# Altium PCB machpcb.PcbDoc
Units mil, origin at the board's own origin, x right, y up, seen from the top; angles counter-clockwise.
Board outline 6000 x 4000 mil, 2 copper layers (Top Layer, Bottom Layer); 5 components, 4 nets, 1203 pads, 0 vias.
Unrouted connection lines stored in the file: 4.
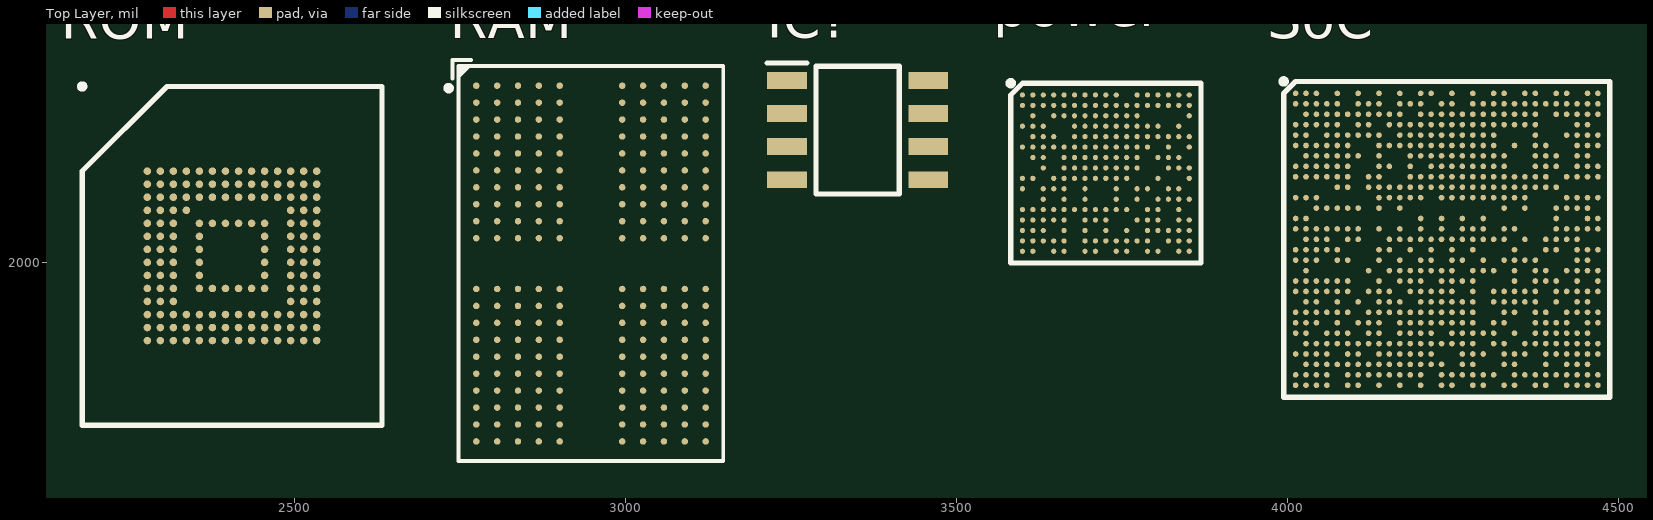
[diagram p0: Top Layer view]
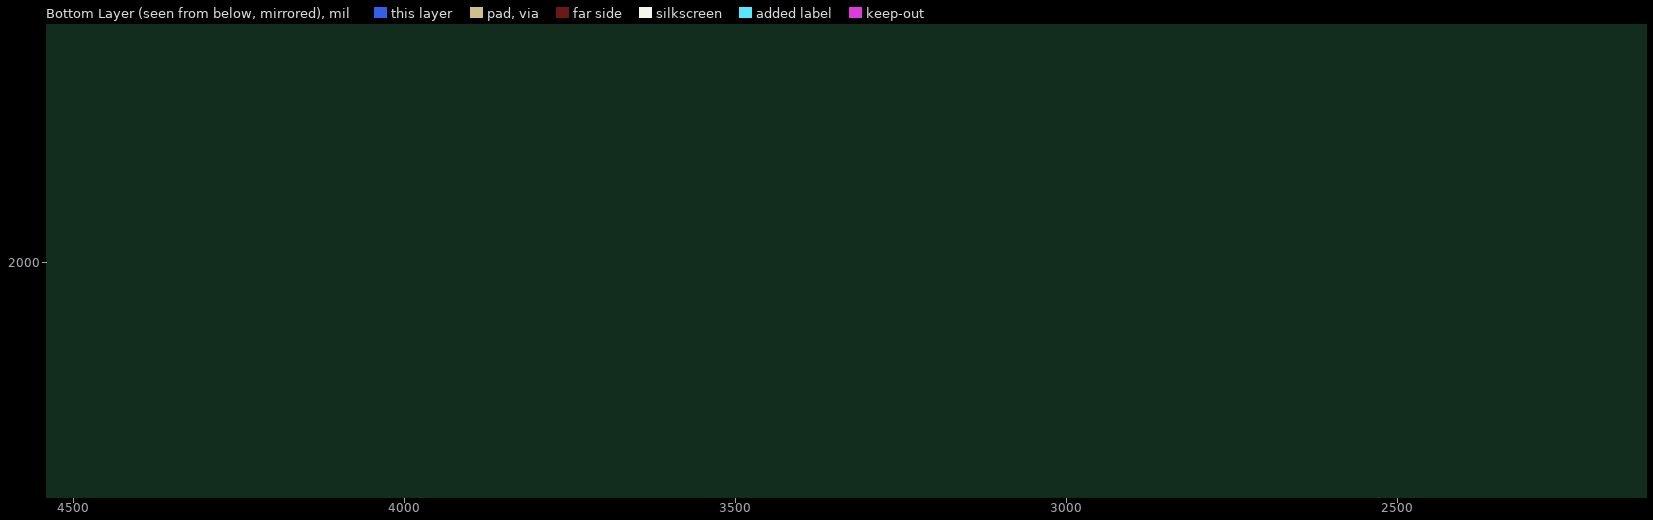
[diagram p1: Bottom Layer view, seen from below]

## Layer stack, top to bottom
Top Solder: solder mask 0.4, Solder Resist, Dk 3.5
Top Layer: signal copper 1.4
Dielectric 1: dielectric 12.6, FR-4, Dk 4.8
Bottom Layer: signal copper 1.4
Bottom Solder: solder mask 0.4, Solder Resist, Dk 3.5

## Board outline
0,0 6000,0 6000,4000 0,4000

## Design rules (kind name [scope] priority, off if disabled: settings)
Clearance [All] p1: gap=10 ignorepadtopadclearanceinfootprint=FALSE
PolygonConnect [All] p1: connectstyle=Relief reliefconductorwidth=10 reliefentries=4 polygonreliefangle="90 Angle" airgapwidth=10
RoutingVias [All] p1: holewidth=28 width=50 viastyle="Through Hole" minholewidth=28 minwidth=50 maxholewidth=28 maxwidth=50
SolderMaskExpansion [All] p1: expansion=4 istentingtop=FALSE
Width [All] p1: maxlimit=10 minlimit=10 preferedwidth=10
30 further rules are at their usual default settings.

## Components (designator, comment, footprint, x,y, rotation, side; value= is the part's Value field where it differs from the comment)
IC? "NE555DR" SOIC127P600X175-8N 3350,2200 r0 top
power "MT6357ARV_A" BGA209C40P17X16_700X660X100 3725,2135 r0 top (schematic designator IC?)
RAM "K4UBE3D4AA-MGCL" K4F8E304HB-MGCJ 2950,1990 r0 top (schematic designator U?)
ROM "KLMAG1JETD-B041" BGA153C50P14X14_1150X1300X80 2405,2010 r0 top (schematic designator IC?)
SoC "MT8365V_BZB" BGA633C40P30X29_1220X1180X90 4240,2035 r0 top (schematic designator IC?)

## Footprints (in the part's own frame and the unit in brackets; to place one, negate y for a bottom-side part, rotate by r counter-clockwise, add the part's x,y. Pads: shape width x height; smd on the part's side, far side on the other; paste and mask are expansions set on the pad)
BGA153C50P14X14_1150X1300X80 [mm]
  round 0.29 smd: A1(-3.25,3.25) A2(-2.75,3.25) A3(-2.25,3.25) A4(-1.75,3.25) A5(-1.25,3.25) A6(-0.75,3.25) A7(-0.25,3.25) A8(0.25,3.25) A9(0.75,3.25) A10(1.25,3.25) A11(1.75,3.25) A12(2.25,3.25) A13(2.75,3.25) A14(3.25,3.25) B1(-3.25,2.75) B2(-2.75,2.75) B3(-2.25,2.75) B4(-1.75,2.75) B5(-1.25,2.75) B6(-0.75,2.75) B7(-0.25,2.75) B8(0.25,2.75) B9(0.75,2.75) B10(1.25,2.75) B11(1.75,2.75) B12(2.25,2.75) B13(2.75,2.75) B14(3.25,2.75) C1(-3.25,2.25) C2(-2.75,2.25) C3(-2.25,2.25) C4(-1.75,2.25) C5(-1.25,2.25) C6(-0.75,2.25) C7(-0.25,2.25) C8(0.25,2.25) C9(0.75,2.25) C10(1.25,2.25) C11(1.75,2.25) C12(2.25,2.25) C13(2.75,2.25) C14(3.25,2.25) D1(-3.25,1.75) D2(-2.75,1.75) D3(-2.25,1.75) D4(-1.75,1.75) D12(2.25,1.75) D13(2.75,1.75) D14(3.25,1.75) E1(-3.25,1.25) E2(-2.75,1.25) E3(-2.25,1.25) E5(-1.25,1.25) E6(-0.75,1.25) E7(-0.25,1.25) E8(0.25,1.25) E9(0.75,1.25) E10(1.25,1.25) E12(2.25,1.25) E13(2.75,1.25) E14(3.25,1.25) F1(-3.25,0.75) F2(-2.75,0.75) F3(-2.25,0.75) F5(-1.25,0.75) F10(1.25,0.75) F12(2.25,0.75) F13(2.75,0.75) F14(3.25,0.75) G1(-3.25,0.25) G2(-2.75,0.25) G3(-2.25,0.25) G5(-1.25,0.25) G10(1.25,0.25) G12(2.25,0.25) G13(2.75,0.25) G14(3.25,0.25) H1(-3.25,-0.25) H2(-2.75,-0.25) H3(-2.25,-0.25) H5(-1.25,-0.25) H10(1.25,-0.25) H12(2.25,-0.25) H13(2.75,-0.25) H14(3.25,-0.25) J1(-3.25,-0.75) J2(-2.75,-0.75) J3(-2.25,-0.75) J5(-1.25,-0.75) J10(1.25,-0.75) J12(2.25,-0.75) J13(2.75,-0.75) J14(3.25,-0.75) K1(-3.25,-1.25) K2(-2.75,-1.25) K3(-2.25,-1.25) K5(-1.25,-1.25) K6(-0.75,-1.25) K7(-0.25,-1.25) K8(0.25,-1.25) K9(0.75,-1.25) K10(1.25,-1.25) K12(2.25,-1.25) K13(2.75,-1.25) K14(3.25,-1.25) L1(-3.25,-1.75) L2(-2.75,-1.75) L3(-2.25,-1.75) L12(2.25,-1.75) L13(2.75,-1.75) L14(3.25,-1.75) M1(-3.25,-2.25) M2(-2.75,-2.25) M3(-2.25,-2.25) M4(-1.75,-2.25) M5(-1.25,-2.25) M6(-0.75,-2.25) M7(-0.25,-2.25) M8(0.25,-2.25) M9(0.75,-2.25) M10(1.25,-2.25) M11(1.75,-2.25) M12(2.25,-2.25) M13(2.75,-2.25) M14(3.25,-2.25) N1(-3.25,-2.75) N2(-2.75,-2.75) N3(-2.25,-2.75) N4(-1.75,-2.75) N5(-1.25,-2.75) N6(-0.75,-2.75) N7(-0.25,-2.75) N8(0.25,-2.75) N9(0.75,-2.75) N10(1.25,-2.75) N11(1.75,-2.75) N12(2.25,-2.75) N13(2.75,-2.75) N14(3.25,-2.75) P1(-3.25,-3.25) P2(-2.75,-3.25) P3(-2.25,-3.25) P4(-1.75,-3.25) P5(-1.25,-3.25) P6(-0.75,-3.25) P7(-0.25,-3.25) P8(0.25,-3.25) P9(0.75,-3.25) P10(1.25,-3.25) P11(1.75,-3.25) P12(2.25,-3.25) P13(2.75,-3.25) P14(3.25,-3.25)
  silkscreen extent -5.85,-6.5 5.75,6.6, body extent -5.75,-6.5 5.75,6.5, height 0.8
BGA209C40P17X16_700X660X100 [mm]
  round 0.2 smd: A1(-3.2,3) A2(-2.8,3) A3(-2.4,3) A4(-2,3) A5(-1.6,3) A6(-1.2,3) A7(-0.8,3) A8(-0.4,3) A9(0,3) A10(0.4,3) A12(1.2,3) A13(1.6,3) A14(2,3) A15(2.4,3) A16(2.8,3) A17(3.2,3) B1(-3.2,2.6) B2(-2.8,2.6) B3(-2.4,2.6) B4(-2,2.6) B5(-1.6,2.6) B6(-1.2,2.6) B7(-0.8,2.6) B8(-0.4,2.6) B9(0,2.6) B10(0.4,2.6) B11(0.8,2.6) B12(1.2,2.6) B13(1.6,2.6) B14(2,2.6) B15(2.4,2.6) B16(2.8,2.6) B17(3.2,2.6) C2(-2.8,2.2) C4(-2,2.2) C5(-1.6,2.2) C6(-1.2,2.2) C7(-0.8,2.2) C8(-0.4,2.2) C9(0,2.2) C10(0.4,2.2) C11(0.8,2.2) C12(1.2,2.2) C17(3.2,2.2) D1(-3.2,1.8) D2(-2.8,1.8) D3(-2.4,1.8) D6(-1.2,1.8) D7(-0.8,1.8) D8(-0.4,1.8) D9(0,1.8) D10(0.4,1.8) D11(0.8,1.8) D12(1.2,1.8) D13(1.6,1.8) D14(2,1.8) D16(2.8,1.8) E2(-2.8,1.4) E3(-2.4,1.4) E4(-2,1.4) E6(-1.2,1.4) E7(-0.8,1.4) E8(-0.4,1.4) E9(0,1.4) E10(0.4,1.4) E11(0.8,1.4) E12(1.2,1.4) E13(1.6,1.4) E14(2,1.4) E15(2.4,1.4) E16(2.8,1.4) E17(3.2,1.4) F1(-3.2,1) F2(-2.8,1) F3(-2.4,1) F4(-2,1) F5(-1.6,1) F6(-1.2,1) F7(-0.8,1) F8(-0.4,1) F9(0,1) F10(0.4,1) F11(0.8,1) F12(1.2,1) F13(1.6,1) F15(2.4,1) F17(3.2,1) G2(-2.8,0.6) G3(-2.4,0.6) G5(-1.6,0.6) G6(-1.2,0.6) G7(-0.8,0.6) G8(-0.4,0.6) G9(0,0.6) G10(0.4,0.6) G11(0.8,0.6) G12(1.2,0.6) G14(2,0.6) G15(2.4,0.6) G16(2.8,0.6) H3(-2.4,0.2) H5(-1.6,0.2) H6(-1.2,0.2) H7(-0.8,0.2) H8(-0.4,0.2) H9(0,0.2) H10(0.4,0.2) H11(0.8,0.2) H12(1.2,0.2) H15(2.4,0.2) H16(2.8,0.2) H17(3.2,0.2) J1(-3.2,-0.2) J2(-2.8,-0.2) J4(-2,-0.2) J5(-1.6,-0.2) J6(-1.2,-0.2) J7(-0.8,-0.2) J8(-0.4,-0.2) J9(0,-0.2) J10(0.4,-0.2) J11(0.8,-0.2) J14(2,-0.2) J17(3.2,-0.2) K1(-3.2,-0.6) K3(-2.4,-0.6) K4(-2,-0.6) K5(-1.6,-0.6) K7(-0.8,-0.6) K10(0.4,-0.6) K12(1.2,-0.6) K13(1.6,-0.6) K15(2.4,-0.6) K16(2.8,-0.6) L3(-2.4,-1) L5(-1.6,-1) L7(-0.8,-1) L10(0.4,-1) L12(1.2,-1) L14(2,-1) L15(2.4,-1) L16(2.8,-1) L17(3.2,-1) M1(-3.2,-1.4) M2(-2.8,-1.4) M3(-2.4,-1.4) M4(-2,-1.4) M5(-1.6,-1.4) M6(-1.2,-1.4) M7(-0.8,-1.4) M8(-0.4,-1.4) M9(0,-1.4) M10(0.4,-1.4) M11(0.8,-1.4) M13(1.6,-1.4) M14(2,-1.4) M16(2.8,-1.4) N1(-3.2,-1.8) N2(-2.8,-1.8) N3(-2.4,-1.8) N4(-2,-1.8) N5(-1.6,-1.8) N7(-0.8,-1.8) N8(-0.4,-1.8) N9(0,-1.8) N12(1.2,-1.8) N13(1.6,-1.8) N14(2,-1.8) N16(2.8,-1.8) N17(3.2,-1.8) P1(-3.2,-2.2) P2(-2.8,-2.2) P3(-2.4,-2.2) P5(-1.6,-2.2) P7(-0.8,-2.2) P9(0,-2.2) P11(0.8,-2.2) P13(1.6,-2.2) P14(2,-2.2) P15(2.4,-2.2) P16(2.8,-2.2) P17(3.2,-2.2) R1(-3.2,-2.6) R2(-2.8,-2.6) R3(-2.4,-2.6) R4(-2,-2.6) R5(-1.6,-2.6) R7(-0.8,-2.6) R8(-0.4,-2.6) R9(0,-2.6) R10(0.4,-2.6) R11(0.8,-2.6) R12(1.2,-2.6) R13(1.6,-2.6) R15(2.4,-2.6) R16(2.8,-2.6) R17(3.2,-2.6) T1(-3.2,-3) T2(-2.8,-3) T4(-2,-3) T5(-1.6,-3) T7(-0.8,-3) T8(-0.4,-3) T10(0.4,-3) T11(0.8,-3) T13(1.6,-3) T14(2,-3) T16(2.8,-3) T17(3.2,-3)
  silkscreen extent -3.75,-3.45 3.65,3.55, body extent -3.5,-3.3 3.5,3.3, height 1
BGA633C40P30X29_1220X1180X90 [mm]
  round 0.216 smd: A1(-5.8,5.6) A2(-5.4,5.6) A3(-5,5.6) A5(-4.2,5.6) A7(-3.4,5.6) A9(-2.6,5.6) A11(-1.8,5.6) A13(-1,5.6) A14(-0.6,5.6) A16(0.2,5.6) A18(1,5.6) A20(1.8,5.6) A21(2.2,5.6) A23(3,5.6) A24(3.4,5.6) A26(4.2,5.6) A27(4.6,5.6) A29(5.4,5.6) A30(5.8,5.6) AA2(-5.4,-2.4) AA3(-5,-2.4) AA5(-4.2,-2.4) AA7(-3.4,-2.4) AA9(-2.6,-2.4) AA10(-2.2,-2.4) AA11(-1.8,-2.4) AA13(-1,-2.4) AA14(-0.6,-2.4) AA15(-0.2,-2.4) AA16(0.2,-2.4) AA17(0.6,-2.4) AA18(1,-2.4) AA20(1.8,-2.4) AA21(2.2,-2.4) AA22(2.6,-2.4) AA23(3,-2.4) AA24(3.4,-2.4) AA26(4.2,-2.4) AA28(5,-2.4) AA29(5.4,-2.4) AB1(-5.8,-2.8) AB2(-5.4,-2.8) AB3(-5,-2.8) AB4(-4.6,-2.8) AB5(-4.2,-2.8) AB6(-3.8,-2.8) AB8(-3,-2.8) AB9(-2.6,-2.8) AB10(-2.2,-2.8) AB11(-1.8,-2.8) AB12(-1.4,-2.8) AB13(-1,-2.8) AB14(-0.6,-2.8) AB15(-0.2,-2.8) AB16(0.2,-2.8) AB17(0.6,-2.8) AB18(1,-2.8) AB21(2.2,-2.8) AB22(2.6,-2.8) AB24(3.4,-2.8) AB25(3.8,-2.8) AB27(4.6,-2.8) AB28(5,-2.8) AB29(5.4,-2.8) AB30(5.8,-2.8) AC1(-5.8,-3.2) AC2(-5.4,-3.2) AC3(-5,-3.2) AC5(-4.2,-3.2) AC7(-3.4,-3.2) AC8(-3,-3.2) AC9(-2.6,-3.2) AC11(-1.8,-3.2) AC12(-1.4,-3.2) AC13(-1,-3.2) AC14(-0.6,-3.2) AC15(-0.2,-3.2) AC16(0.2,-3.2) AC17(0.6,-3.2) AC18(1,-3.2) AC20(1.8,-3.2) AC21(2.2,-3.2) AC24(3.4,-3.2) AC25(3.8,-3.2) AC26(4.2,-3.2) AC27(4.6,-3.2) AC29(5.4,-3.2) AC30(5.8,-3.2) AD1(-5.8,-3.6) AD2(-5.4,-3.6) AD4(-4.6,-3.6) AD5(-4.2,-3.6) AD6(-3.8,-3.6) AD8(-3,-3.6) AD9(-2.6,-3.6) AD11(-1.8,-3.6) AD12(-1.4,-3.6) AD13(-1,-3.6) AD14(-0.6,-3.6) AD16(0.2,-3.6) AD17(0.6,-3.6) AD18(1,-3.6) AD19(1.4,-3.6) AD20(1.8,-3.6) AD22(2.6,-3.6) AD24(3.4,-3.6) AD25(3.8,-3.6) AD26(4.2,-3.6) AD27(4.6,-3.6) AD28(5,-3.6) AD29(5.4,-3.6) AE2(-5.4,-4) AE3(-5,-4) AE4(-4.6,-4) AE5(-4.2,-4) AE6(-3.8,-4) AE7(-3.4,-4) AE8(-3,-4) AE9(-2.6,-4) AE10(-2.2,-4) AE11(-1.8,-4) AE12(-1.4,-4) AE13(-1,-4) AE14(-0.6,-4) AE15(-0.2,-4) AE16(0.2,-4) AE17(0.6,-4) AE18(1,-4) AE20(1.8,-4) AE21(2.2,-4) AE23(3,-4) AE24(3.4,-4) AE25(3.8,-4) AE26(4.2,-4) AE27(4.6,-4) AE28(5,-4) AE29(5.4,-4) AE30(5.8,-4) AF1(-5.8,-4.4) AF2(-5.4,-4.4) AF3(-5,-4.4) AF4(-4.6,-4.4) AF6(-3.8,-4.4) AF7(-3.4,-4.4) AF9(-2.6,-4.4) AF10(-2.2,-4.4) AF11(-1.8,-4.4) AF12(-1.4,-4.4) AF13(-1,-4.4) AF14(-0.6,-4.4) AF17(0.6,-4.4) AF18(1,-4.4) AF19(1.4,-4.4) AF21(2.2,-4.4) AF22(2.6,-4.4) AF23(3,-4.4) AF25(3.8,-4.4) AF26(4.2,-4.4) AF27(4.6,-4.4) AF28(5,-4.4) AF29(5.4,-4.4) AF30(5.8,-4.4) AG2(-5.4,-4.8) AG3(-5,-4.8) AG4(-4.6,-4.8) AG5(-4.2,-4.8) AG6(-3.8,-4.8) AG7(-3.4,-4.8) AG8(-3,-4.8) AG9(-2.6,-4.8) AG10(-2.2,-4.8) AG11(-1.8,-4.8) AG12(-1.4,-4.8) AG13(-1,-4.8) AG14(-0.6,-4.8) AG15(-0.2,-4.8) AG17(0.6,-4.8) AG18(1,-4.8) AG21(2.2,-4.8) AG22(2.6,-4.8) AG25(3.8,-4.8) AG27(4.6,-4.8) AG28(5,-4.8) AG29(5.4,-4.8) AH1(-5.8,-5.2) AH2(-5.4,-5.2) AH3(-5,-5.2) AH4(-4.6,-5.2) AH6(-3.8,-5.2) AH7(-3.4,-5.2) AH8(-3,-5.2) AH9(-2.6,-5.2) AH10(-2.2,-5.2) AH11(-1.8,-5.2) AH12(-1.4,-5.2) AH13(-1,-5.2) AH15(-0.2,-5.2) AH16(0.2,-5.2) AH17(0.6,-5.2) AH18(1,-5.2) AH19(1.4,-5.2) AH20(1.8,-5.2) AH22(2.6,-5.2) AH23(3,-5.2) AH24(3.4,-5.2) AH25(3.8,-5.2) AH26(4.2,-5.2) AH27(4.6,-5.2) AH28(5,-5.2) AH29(5.4,-5.2) AH30(5.8,-5.2) AJ1(-5.8,-5.6) AJ2(-5.4,-5.6) AJ3(-5,-5.6) AJ4(-4.6,-5.6) AJ6(-3.8,-5.6) AJ7(-3.4,-5.6) AJ9(-2.6,-5.6) AJ11(-1.8,-5.6) AJ13(-1,-5.6) AJ15(-0.2,-5.6) AJ16(0.2,-5.6) AJ18(1,-5.6) AJ19(1.4,-5.6) AJ21(2.2,-5.6) AJ22(2.6,-5.6) AJ24(3.4,-5.6) AJ25(3.8,-5.6) AJ27(4.6,-5.6) AJ28(5,-5.6) AJ29(5.4,-5.6) AJ30(5.8,-5.6) B1(-5.8,5.2) B2(-5.4,5.2) B3(-5,5.2) B4(-4.6,5.2) B5(-4.2,5.2) B7(-3.4,5.2) B8(-3,5.2) B9(-2.6,5.2) B11(-1.8,5.2) B12(-1.4,5.2) B13(-1,5.2) B15(-0.2,5.2) B16(0.2,5.2) B18(1,5.2) B19(1.4,5.2) B20(1.8,5.2) B21(2.2,5.2) B22(2.6,5.2) B23(3,5.2) B24(3.4,5.2) B25(3.8,5.2) B26(4.2,5.2) B27(4.6,5.2) B28(5,5.2) B29(5.4,5.2) B30(5.8,5.2) C2(-5.4,4.8) C3(-5,4.8) C4(-4.6,4.8) C5(-4.2,4.8) C6(-3.8,4.8) C7(-3.4,4.8) C8(-3,4.8) C9(-2.6,4.8) C10(-2.2,4.8) C11(-1.8,4.8) C13(-1,4.8) C14(-0.6,4.8) C15(-0.2,4.8) C16(0.2,4.8) C17(0.6,4.8) C18(1,4.8) C19(1.4,4.8) C20(1.8,4.8) C21(2.2,4.8) C22(2.6,4.8) C23(3,4.8) C24(3.4,4.8) C26(4.2,4.8) C27(4.6,4.8) C28(5,4.8) C29(5.4,4.8) C30(5.8,4.8) D1(-5.8,4.4) D2(-5.4,4.4) D3(-5,4.4) D4(-4.6,4.4) D5(-4.2,4.4) D7(-3.4,4.4) D8(-3,4.4) D10(-2.2,4.4) D11(-1.8,4.4) D12(-1.4,4.4) D13(-1,4.4) D14(-0.6,4.4) D15(-0.2,4.4) D16(0.2,4.4) D17(0.6,4.4) D18(1,4.4) D19(1.4,4.4) D20(1.8,4.4) D21(2.2,4.4) D22(2.6,4.4) D23(3,4.4) D24(3.4,4.4) D28(5,4.4) D29(5.4,4.4) E1(-5.8,4) E2(-5.4,4) E4(-4.6,4) E5(-4.2,4) E6(-3.8,4) E7(-3.4,4) E8(-3,4) E9(-2.6,4) E11(-1.8,4) E12(-1.4,4) E13(-1,4) E14(-0.6,4) E15(-0.2,4) E16(0.2,4) E17(0.6,4) E18(1,4) E19(1.4,4) E20(1.8,4) E24(3.4,4) E27(4.6,4) E28(5,4) E29(5.4,4) E30(5.8,4) F1(-5.8,3.6) F2(-5.4,3.6) F3(-5,3.6) F4(-4.6,3.6) F5(-4.2,3.6) F6(-3.8,3.6) F9(-2.6,3.6) F10(-2.2,3.6) F11(-1.8,3.6) F12(-1.4,3.6) F13(-1,3.6) F14(-0.6,3.6) F15(-0.2,3.6) F16(0.2,3.6) F17(0.6,3.6) F18(1,3.6) F19(1.4,3.6) F20(1.8,3.6) F22(2.6,3.6) F24(3.4,3.6) F25(3.8,3.6) F28(5,3.6) F29(5.4,3.6) F30(5.8,3.6) G2(-5.4,3.2) G3(-5,3.2) G4(-4.6,3.2) G5(-4.2,3.2) G6(-3.8,3.2) G7(-3.4,3.2) G9(-2.6,3.2) G12(-1.4,3.2) G13(-1,3.2) G14(-0.6,3.2) G15(-0.2,3.2) G16(0.2,3.2) G17(0.6,3.2) G18(1,3.2) G19(1.4,3.2) G20(1.8,3.2) G21(2.2,3.2) G24(3.4,3.2) G25(3.8,3.2) G26(4.2,3.2) G28(5,3.2) G29(5.4,3.2) H1(-5.8,2.8) H2(-5.4,2.8) H3(-5,2.8) H4(-4.6,2.8) H5(-4.2,2.8) H6(-3.8,2.8) H9(-2.6,2.8) H10(-2.2,2.8) H12(-1.4,2.8) H14(-0.6,2.8) H15(-0.2,2.8) H16(0.2,2.8) H17(0.6,2.8) H18(1,2.8) H19(1.4,2.8) H20(1.8,2.8) H21(2.2,2.8) H24(3.4,2.8) H25(3.8,2.8) H26(4.2,2.8) H28(5,2.8) H29(5.4,2.8) H30(5.8,2.8) J1(-5.8,2.4) J2(-5.4,2.4) J3(-5,2.4) J4(-4.6,2.4) J5(-4.2,2.4) J6(-3.8,2.4) J8(-3,2.4) J9(-2.6,2.4) J12(-1.4,2.4) J13(-1,2.4) J14(-0.6,2.4) J15(-0.2,2.4) J16(0.2,2.4) J17(0.6,2.4) J18(1,2.4) J19(1.4,2.4) J20(1.8,2.4) J21(2.2,2.4) J22(2.6,2.4) J23(3,2.4) J24(3.4,2.4) J25(3.8,2.4) J27(4.6,2.4) J28(5,2.4) J29(5.4,2.4) J30(5.8,2.4) K5(-4.2,2) K6(-3.8,2) K8(-3,2) K9(-2.6,2) K10(-2.2,2) K11(-1.8,2) K12(-1.4,2) K13(-1,2) K14(-0.6,2) K15(-0.2,2) K16(0.2,2) K17(0.6,2) K18(1,2) K19(1.4,2) K20(1.8,2) K21(2.2,2) K22(2.6,2) K23(3,2) K24(3.4,2) K25(3.8,2) K26(4.2,2) L1(-5.8,1.6) L2(-5.4,1.6) L3(-5,1.6) L9(-2.6,1.6) L10(-2.2,1.6) L11(-1.8,1.6) L12(-1.4,1.6) L13(-1,1.6) L15(-0.2,1.6) L16(0.2,1.6) L17(0.6,1.6) L18(1,1.6) L19(1.4,1.6) L20(1.8,1.6) L21(2.2,1.6) L22(2.6,1.6) L23(3,1.6) L27(4.6,1.6) L28(5,1.6) L29(5.4,1.6) L30(5.8,1.6) M3(-5,1.2) M4(-4.6,1.2) M5(-4.2,1.2) M6(-3.8,1.2) M7(-3.4,1.2) M9(-2.6,1.2) M11(-1.8,1.2) M21(2.2,1.2) M23(3,1.2) M26(4.2,1.2) M27(4.6,1.2) M28(5,1.2) M29(5.4,1.2) N1(-5.8,0.8) N2(-5.4,0.8) N13(-1,0.8) N15(-0.2,0.8) N17(0.6,0.8) N19(1.4,0.8) N26(4.2,0.8) N29(5.4,0.8) N30(5.8,0.8) P1(-5.8,0.4) P2(-5.4,0.4) P3(-5,0.4) P4(-4.6,0.4) P5(-4.2,0.4) P6(-3.8,0.4) P7(-3.4,0.4) P9(-2.6,0.4) P11(-1.8,0.4) P13(-1,0.4) P15(-0.2,0.4) P17(0.6,0.4) P18(1,0.4) P19(1.4,0.4) P21(2.2,0.4) P22(2.6,0.4) P26(4.2,0.4) P27(4.6,0.4) P28(5,0.4) P29(5.4,0.4) P30(5.8,0.4) R2(-5.4,0) R3(-5,0) R4(-4.6,0) R6(-3.8,0) R7(-3.4,0) R10(-2.2,0) R11(-1.8,0) R12(-1.4,0) R13(-1,0) R14(-0.6,0) R15(-0.2,0) R16(0.2,0) R17(0.6,0) R18(1,0) R19(1.4,0) R20(1.8,0) R21(2.2,0) R23(3,0) R25(3.8,0) R26(4.2,0) R27(4.6,0) R28(5,0) T1(-5.8,-0.4) T2(-5.4,-0.4) T3(-5,-0.4) T4(-4.6,-0.4) T5(-4.2,-0.4) T9(-2.6,-0.4) T10(-2.2,-0.4) T12(-1.4,-0.4) T14(-0.6,-0.4) T16(0.2,-0.4) T18(1,-0.4) T22(2.6,-0.4) T25(3.8,-0.4) T26(4.2,-0.4) T28(5,-0.4) T29(5.4,-0.4) T30(5.8,-0.4) U1(-5.8,-0.8) U2(-5.4,-0.8) U3(-5,-0.8) U5(-4.2,-0.8) U6(-3.8,-0.8) U9(-2.6,-0.8) U11(-1.8,-0.8) U13(-1,-0.8) U14(-0.6,-0.8) U16(0.2,-0.8) U17(0.6,-0.8) U19(1.4,-0.8) U21(2.2,-0.8) U22(2.6,-0.8) U23(3,-0.8) U24(3.4,-0.8) U28(5,-0.8) U29(5.4,-0.8) V2(-5.4,-1.2) V8(-3,-1.2) V10(-2.2,-1.2) V11(-1.8,-1.2) V12(-1.4,-1.2) V13(-1,-1.2) V14(-0.6,-1.2) V15(-0.2,-1.2) V16(0.2,-1.2) V18(1,-1.2) V19(1.4,-1.2) V20(1.8,-1.2) V22(2.6,-1.2) V24(3.4,-1.2) V25(3.8,-1.2) V27(4.6,-1.2) V28(5,-1.2) V29(5.4,-1.2) V30(5.8,-1.2) W1(-5.8,-1.6) W2(-5.4,-1.6) W3(-5,-1.6) W4(-4.6,-1.6) W5(-4.2,-1.6) W6(-3.8,-1.6) W9(-2.6,-1.6) W11(-1.8,-1.6) W12(-1.4,-1.6) W13(-1,-1.6) W15(-0.2,-1.6) W16(0.2,-1.6) W17(0.6,-1.6) W18(1,-1.6) W22(2.6,-1.6) W24(3.4,-1.6) W25(3.8,-1.6) W26(4.2,-1.6) W28(5,-1.6) W30(5.8,-1.6) Y1(-5.8,-2) Y2(-5.4,-2) Y3(-5,-2) Y4(-4.6,-2) Y5(-4.2,-2) Y6(-3.8,-2) Y8(-3,-2) Y9(-2.6,-2) Y10(-2.2,-2) Y12(-1.4,-2) Y13(-1,-2) Y14(-0.6,-2) Y15(-0.2,-2) Y16(0.2,-2) Y18(1,-2) Y20(1.8,-2) Y21(2.2,-2) Y22(2.6,-2) Y23(3,-2) Y24(3.4,-2) Y26(4.2,-2) Y27(4.6,-2) Y28(5,-2) Y29(5.4,-2) Y30(5.8,-2)
  silkscreen extent -6.36,-6.06 6.26,6.16, body extent -6.1,-5.9 6.1,5.9, height 0.9
K4F8E304HB-MGCJ [mil]
  round 9.76 smd paste-3937 mask+2: A1(-175.99,277.09) A2(-144.49,277.09) A3(-113,277.09) A4(-81.5,277.09) A5(-50,277.09) A8(44.48,277.09) A9(75.98,277.09) A10(107.48,277.09) A11(138.97,277.09) A12(170.47,277.09) AA1(-175.99,-234.72) AA2(-144.49,-234.72) AA3(-113,-234.72) AA4(-81.5,-234.72) AA5(-50,-234.72) AA8(44.48,-234.72) AA9(75.98,-234.72) AA10(107.48,-234.72) AA11(138.97,-234.72) AA12(170.47,-234.72) AB1(-175.99,-260.31) AB2(-144.49,-260.31) AB3(-113,-260.31) AB4(-81.5,-260.31) AB5(-50,-260.31) AB8(44.48,-260.31) AB9(75.98,-260.31) AB10(107.48,-260.31) AB11(138.97,-260.31) AB12(170.47,-260.31) B1(-175.99,251.5) B2(-144.49,251.5) B3(-113,251.5) B4(-81.5,251.5) B5(-50,251.5) B8(44.48,251.5) B9(75.98,251.5) B10(107.48,251.5) B11(138.97,251.5) B12(170.47,251.5) C1(-175.99,225.91) C2(-144.49,225.91) C3(-113,225.91) C4(-81.5,225.91) C5(-50,225.91) C8(44.48,225.91) C9(75.98,225.91) C10(107.48,225.91) C11(138.97,225.91) C12(170.47,225.91) D1(-175.99,200.32) D2(-144.49,200.32) D3(-113,200.32) D4(-81.5,200.32) D5(-50,200.32) D8(44.48,200.32) D9(75.98,200.32) D10(107.48,200.32) D11(138.97,200.32) D12(170.47,200.32) E1(-175.99,174.73) E2(-144.49,174.73) E3(-113,174.73) E4(-81.5,174.73) E5(-50,174.73) E8(44.48,174.73) E9(75.98,174.73) E10(107.48,174.73) E11(138.97,174.73) E12(170.47,174.73) F1(-175.99,149.14) F2(-144.49,149.14) F3(-113,149.14) F4(-81.5,149.14) F5(-50,149.14) F8(44.48,149.14) F9(75.98,149.14) F10(107.48,149.14) F11(138.97,149.14) F12(170.47,149.14) G1(-175.99,123.55) G2(-144.49,123.55) G3(-113,123.55) G4(-81.5,123.55) G5(-50,123.55) G8(44.48,123.55) G9(75.98,123.55) G10(107.48,123.55) G11(138.97,123.55) G12(170.47,123.55) H1(-175.99,97.96) H2(-144.49,97.96) H3(-113,97.96) H4(-81.5,97.96) H5(-50,97.96) H8(44.48,97.96) H9(75.98,97.96) H10(107.48,97.96) H11(138.97,97.96) H12(170.47,97.96) J1(-175.99,72.37) J2(-144.49,72.37) J3(-113,72.37) J4(-81.5,72.37) J5(-50,72.37) J8(44.48,72.37) J9(75.98,72.37) J10(107.48,72.37) J11(138.97,72.37) J12(170.47,72.37) K1(-175.99,46.78) K2(-144.49,46.78) K3(-113,46.78) K4(-81.5,46.78) K5(-50,46.78) K8(44.48,46.78) K9(75.98,46.78) K10(107.48,46.78) K11(138.97,46.78) K12(170.47,46.78) N1(-175.99,-30) N2(-144.49,-30) N3(-113,-30) N4(-81.5,-30) N5(-50,-30) N8(44.48,-30) N9(75.98,-30) N10(107.48,-30) N11(138.97,-30) N12(170.47,-30) P1(-175.99,-55.59) P2(-144.49,-55.59) P3(-113,-55.59) P4(-81.5,-55.59) P5(-50,-55.59) P8(44.48,-55.59) P9(75.98,-55.59) P10(107.48,-55.59) P11(138.97,-55.59) P12(170.47,-55.59) R1(-175.99,-81.18) R2(-144.49,-81.18) R3(-113,-81.18) R4(-81.5,-81.18) R5(-50,-81.18) R8(44.48,-81.18) R9(75.98,-81.18) R10(107.48,-81.18) R11(138.97,-81.18) R12(170.47,-81.18) T1(-175.99,-106.77) T2(-144.49,-106.77) T3(-113,-106.77) T4(-81.5,-106.77) T5(-50,-106.77) T8(44.48,-106.77) T9(75.98,-106.77) T10(107.48,-106.77) T11(138.97,-106.77) T12(170.47,-106.77) U1(-175.99,-132.36) U2(-144.49,-132.36) U3(-113,-132.36) U4(-81.5,-132.36) U5(-50,-132.36) U8(44.48,-132.36) U9(75.98,-132.36) U10(107.48,-132.36) U11(138.97,-132.36) U12(170.47,-132.36) V1(-175.99,-157.95) V2(-144.49,-157.95) V3(-113,-157.95) V4(-81.5,-157.95) V5(-50,-157.95) V8(44.48,-157.95) V9(75.98,-157.95) V10(107.48,-157.95) V11(138.97,-157.95) V12(170.47,-157.95) W1(-175.99,-183.54) W2(-144.49,-183.54) W3(-113,-183.54) W4(-81.5,-183.54) W5(-50,-183.54) W8(44.48,-183.54) W9(75.98,-183.54) W10(107.48,-183.54) W11(138.97,-183.54) W12(170.47,-183.54) Y1(-175.99,-209.13) Y2(-144.49,-209.13) Y3(-113,-209.13) Y4(-81.5,-209.13) Y5(-50,-209.13) Y8(44.48,-209.13) Y9(75.98,-209.13) Y10(107.48,-209.13) Y11(138.97,-209.13) Y12(170.47,-209.13)
  silkscreen extent -222,-290 197,316
SOIC127P600X175-8N [mm]
  rect 1.525x0.65 smd: 1(-2.712,1.905) 2(-2.712,0.635) 3(-2.712,-0.635) 4(-2.712,-1.905) 5(2.712,-1.905) 6(2.712,-0.635) 7(2.712,0.635) 8(2.712,1.905)
  silkscreen extent -3.47,-2.45 1.6,2.58, body extent -3,-2.45 3,2.45, height 1.75

## Part data
IC?: "Integrated Circuit", Manufacturer_Name="Texas Instruments", Mouser Part Number=595-NE555DR, RS Part Number=1218414, Datasheet Link=http://www.ti.com/lit/ds/symlink/ne555.pdf, Height=1.75mm, Manufacturer_Part_Number=NE555DR, Mouser Price/Stock=https://www.mouser.com/Search/Refine.aspx?Keyword=595-NE555DR, RS Price/Stock=http://uk.rs-online.com/web/p/products/1218414
power: "Integrated Circuit", Manufacturer_Name=Mediatek, Manufacturer_Part_Number=MT6357ARV/A, Mouser Part Number=840-MT6357ARV/A, Datasheet Link=https://mediatek-marketing.files.svdcdn.com/production/documents/Genio-PMICs/MTK_MT6357_Product-Brief_v1.0.pdf?dm=1696608680, Height=1mm, Mouser Price/Stock=https://www.mouser.co.uk/ProductDetail/MediaTek/MT6357ARV-A?qs=Jm2GQyTW%2Fbim3iWdQ0ZJPw%3D%3D
RAM: Clock Frequency (fc)=2133MHz, JLCPCB Part Class="Extended Part", LCSC Part Name="K4UBE3D4AA-MGCL 停产", Manufacturer=SAMSUNG(三星半导体), Operating Temperature=-25℃~+85℃, Refresh Current=-, Supply Voltage=1.7V~1.95V, Add into BOM=yes, Convert to PCB=yes, Datasheet=https://atta.szlcsc.com/upload/public/pdf/source/20231024/5530CB18C2033A14DEC9B3A35E728586.pdf, Device=K4UBE3D4AA-MGCL, Manufacturer Part=K4UBE3D4AA-MGCL, Memory Format="SDRAM LPDDR4X", Memory Size=32Gbit, Supplier=LCSC, Supplier Footprint=FBGA-200, Supplier Part=C2920257, Supply current=-, Symbol=K4UBE3D4AA-MGCL
ROM: "Integrated Circuit", Manufacturer_Name=SAMSUNG, Datasheet Link=https://datasheet.lcsc.com/lcsc/2007011825_Samsung-KLMAG1JETD-B041_C499919.pdf, Height=0.8mm, Manufacturer_Part_Number=KLMAG1JETD-B041
SoC: "Integrated Circuit", Manufacturer_Name=Mediatek, Manufacturer_Part_Number=MT8365V/BZB, Mouser Part Number=840-MT8365V/BZB, Datasheet Link=https://www.mouser.co.uk/datasheet/2/1074/MT8365_AIoT_Application_Processor_Datasheet_v1_0_2-3106631.pdf, Height=0.9mm, Mouser Price/Stock=https://www.mouser.co.uk/ProductDetail/MediaTek/MT8365V-BZB?qs=Jm2GQyTW%2FbjcedX9ugwNWQ%3D%3D

## Nets (pads, with @x,y where several pads share a name; then routed paths per layer and width w, separated by ;. In a path a pad name is that pad's centre, name@x,y a point inside that pad or via, vN(x,y) a via of type N, cw(c..) or ccw(c..) an arc to the next point about the centre after c; other vN are vias at no path point)
NetIC?_3: IC?.3 RAM.J11
NetIC?_4: IC?.4 SoC.AC7
Netpower_A16: power.A16 RAM.N3
Netpower_T17: power.T17 ROM.A1
pads on no net: IC?.1 IC?.2 IC?.5 IC?.6 IC?.7 IC?.8 power.A1 power.A2 power.A3 power.A4 power.A5 power.A6 power.A7 power.A8 power.A9 power.A10 power.A12 power.A13 power.A14 power.A15 power.A17 power.B1 power.B2 power.B3 power.B4 power.B5 power.B6 power.B7 power.B8 power.B9 power.B10 power.B11 power.B12 power.B13 power.B14 power.B15 power.B16 power.B17 power.C2 power.C4 power.C5 power.C6 power.C7 power.C8 power.C9 power.C10 power.C11 power.C12 power.C17 power.D1 power.D2 power.D3 power.D6 power.D7 power.D8 power.D9 power.D10 power.D11 power.D12 power.D13 power.D14 power.D16 power.E2 power.E3 power.E4 power.E6 power.E7 power.E8 power.E9 power.E10 power.E11 power.E12 power.E13 power.E14 power.E15 power.E16 power.E17 power.F1 power.F2 power.F3 power.F4 power.F5 power.F6 power.F7 power.F8 power.F9 power.F10 power.F11 power.F12 power.F13 power.F15 power.F17 power.G2 power.G3 power.G5 power.G6 power.G7 power.G8 power.G9 power.G10 power.G11 power.G12 power.G14 power.G15 power.G16 power.H3 power.H5 power.H6 power.H7 power.H8 power.H9 power.H10 power.H11 power.H12 power.H15 power.H16 power.H17 power.J1 power.J2 power.J4 power.J5 power.J6 power.J7 power.J8 power.J9 power.J10 power.J11 power.J14 power.J17 power.K1 power.K3 power.K4 power.K5 power.K7 power.K10 power.K12 power.K13 power.K15 power.K16 power.L3 power.L5 power.L7 power.L10 power.L12 power.L14 power.L15 power.L16 power.L17 power.M1 power.M2 power.M3 power.M4 power.M5 power.M6 power.M7 power.M8 power.M9 power.M10 power.M11 power.M13 power.M14 power.M16 power.N1 power.N2 power.N3 power.N4 power.N5 power.N7 power.N8 power.N9 power.N12 power.N13 power.N14 power.N16 power.N17 power.P1 power.P2 power.P3 power.P5 power.P7 power.P9 power.P11 power.P13 power.P14 power.P15 power.P16 power.P17 power.R1 power.R2 power.R3 power.R4 power.R5 power.R7 power.R8 power.R9 power.R10 power.R11 power.R12 power.R13 power.R15 power.R16 power.R17 power.T1 power.T2 power.T4 power.T5 power.T7 power.T8 power.T10 power.T11 power.T13 power.T14 power.T16 RAM.A1 RAM.A2 RAM.A3 RAM.A4 RAM.A5 RAM.A8 RAM.A9 RAM.A10 RAM.A11 RAM.A12 RAM.AA1 RAM.AA2 RAM.AA3 RAM.AA4 RAM.AA5 RAM.AA8 RAM.AA9 RAM.AA10 RAM.AA11 RAM.AA12 RAM.AB1 RAM.AB2 RAM.AB3 RAM.AB4 RAM.AB5 RAM.AB8 RAM.AB9 RAM.AB10 RAM.AB11 RAM.AB12 RAM.B1 RAM.B2 RAM.B3 RAM.B4 RAM.B5 RAM.B8 RAM.B9 RAM.B10 RAM.B11 RAM.B12 RAM.C1 RAM.C2 RAM.C3 RAM.C4 RAM.C5 RAM.C8 RAM.C9 RAM.C10 RAM.C11 RAM.C12 RAM.D1 RAM.D2 RAM.D3 RAM.D4 RAM.D5 RAM.D8 RAM.D9 RAM.D10 RAM.D11 RAM.D12 RAM.E1 RAM.E2 RAM.E3 RAM.E4 RAM.E5 RAM.E8 RAM.E9 RAM.E10 RAM.E11 RAM.E12 RAM.F1 RAM.F2 RAM.F3 RAM.F4 RAM.F5 RAM.F8 RAM.F9 RAM.F10 RAM.F11 RAM.F12 RAM.G1 RAM.G2 RAM.G3 RAM.G4 RAM.G5 RAM.G8 RAM.G9 RAM.G10 RAM.G11 RAM.G12 RAM.H1 RAM.H2 RAM.H3 RAM.H4 RAM.H5 RAM.H8 RAM.H9 RAM.H10 RAM.H11 RAM.H12 RAM.J1 RAM.J2 RAM.J3 RAM.J4 RAM.J5 RAM.J8 RAM.J9 RAM.J10 RAM.J12 RAM.K1 RAM.K2 RAM.K3 RAM.K4 RAM.K5 RAM.K8 RAM.K9 RAM.K10 RAM.K11 RAM.K12 RAM.N1 RAM.N2 RAM.N4 RAM.N5 RAM.N8 RAM.N9 RAM.N10 RAM.N11 RAM.N12 RAM.P1 RAM.P2 RAM.P3 RAM.P4 RAM.P5 RAM.P8 RAM.P9 RAM.P10 RAM.P11 RAM.P12 RAM.R1 RAM.R2 RAM.R3 RAM.R4 RAM.R5 RAM.R8 RAM.R9 RAM.R10 RAM.R11 RAM.R12 RAM.T1 RAM.T2 RAM.T3 RAM.T4 RAM.T5 RAM.T8 RAM.T9 RAM.T10 RAM.T11 RAM.T12 RAM.U1 RAM.U2 RAM.U3 RAM.U4 RAM.U5 RAM.U8 RAM.U9 RAM.U10 RAM.U11 RAM.U12 RAM.V1 RAM.V2 RAM.V3 RAM.V4 RAM.V5 RAM.V8 RAM.V9 RAM.V10 RAM.V11 RAM.V12 RAM.W1 RAM.W2 RAM.W3 RAM.W4 RAM.W5 RAM.W8 RAM.W9 RAM.W10 RAM.W11 RAM.W12 RAM.Y1 RAM.Y2 RAM.Y3 RAM.Y4 RAM.Y5 RAM.Y8 RAM.Y9 RAM.Y10 RAM.Y11 RAM.Y12 ROM.A2 ROM.A3 ROM.A4 ROM.A5 ROM.A6 ROM.A7 ROM.A8 ROM.A9 ROM.A10 ROM.A11 ROM.A12 ROM.A13 ROM.A14 ROM.B1 ROM.B2 ROM.B3 ROM.B4 ROM.B5 ROM.B6 ROM.B7 ROM.B8 ROM.B9 ROM.B10 ROM.B11 ROM.B12 ROM.B13 ROM.B14 ROM.C1 ROM.C2 ROM.C3 ROM.C4 ROM.C5 ROM.C6 ROM.C7 ROM.C8 ROM.C9 ROM.C10 ROM.C11 ROM.C12 ROM.C13 ROM.C14 ROM.D1 ROM.D2 ROM.D3 ROM.D4 ROM.D12 ROM.D13 ROM.D14 ROM.E1 ROM.E2 ROM.E3 ROM.E5 ROM.E6 ROM.E7 ROM.E8 ROM.E9 ROM.E10 ROM.E12 ROM.E13 ROM.E14 ROM.F1 ROM.F2 ROM.F3 ROM.F5 ROM.F10 ROM.F12 ROM.F13 ROM.F14 ROM.G1 ROM.G2 ROM.G3 ROM.G5 ROM.G10 ROM.G12 ROM.G13 ROM.G14 ROM.H1 ROM.H2 ROM.H3 ROM.H5 ROM.H10 ROM.H12 ROM.H13 ROM.H14 ROM.J1 ROM.J2 ROM.J3 ROM.J5 ROM.J10 ROM.J12 ROM.J13 ROM.J14 ROM.K1 ROM.K2 ROM.K3 ROM.K5 ROM.K6 ROM.K7 ROM.K8 ROM.K9 ROM.K10 ROM.K12 ROM.K13 ROM.K14 ROM.L1 ROM.L2 ROM.L3 ROM.L12 ROM.L13 ROM.L14 ROM.M1 ROM.M2 ROM.M3 ROM.M4 ROM.M5 ROM.M6 ROM.M7 ROM.M8 ROM.M9 ROM.M10 ROM.M11 ROM.M12 ROM.M13 ROM.M14 ROM.N1 ROM.N2 ROM.N3 ROM.N4 ROM.N5 ROM.N6 ROM.N7 ROM.N8 ROM.N9 ROM.N10 ROM.N11 ROM.N12 ROM.N13 ROM.N14 ROM.P1 ROM.P2 ROM.P3 ROM.P4 ROM.P5 ROM.P6 ROM.P7 ROM.P8 ROM.P9 ROM.P10 ROM.P11 ROM.P12 ROM.P13 ROM.P14 SoC.A1 SoC.A2 SoC.A3 SoC.A5 SoC.A7 SoC.A9 SoC.A11 SoC.A13 SoC.A14 SoC.A16 SoC.A18 SoC.A20 SoC.A21 SoC.A23 SoC.A24 SoC.A26 SoC.A27 SoC.A29 SoC.A30 SoC.AA2 SoC.AA3 SoC.AA5 SoC.AA7 SoC.AA9 SoC.AA10 SoC.AA11 SoC.AA13 SoC.AA14 SoC.AA15 SoC.AA16 SoC.AA17 SoC.AA18 SoC.AA20 SoC.AA21 SoC.AA22 SoC.AA23 SoC.AA24 SoC.AA26 SoC.AA28 SoC.AA29 SoC.AB1 SoC.AB2 SoC.AB3 SoC.AB4 SoC.AB5 SoC.AB6 SoC.AB8 SoC.AB9 SoC.AB10 SoC.AB11 SoC.AB12 SoC.AB13 SoC.AB14 SoC.AB15 SoC.AB16 SoC.AB17 SoC.AB18 SoC.AB21 SoC.AB22 SoC.AB24 SoC.AB25 SoC.AB27 SoC.AB28 SoC.AB29 SoC.AB30 SoC.AC1 SoC.AC2 SoC.AC3 SoC.AC5 SoC.AC8 SoC.AC9 SoC.AC11 SoC.AC12 SoC.AC13 SoC.AC14 SoC.AC15 SoC.AC16 SoC.AC17 SoC.AC18 SoC.AC20 SoC.AC21 SoC.AC24 SoC.AC25 SoC.AC26 SoC.AC27 SoC.AC29 SoC.AC30 SoC.AD1 SoC.AD2 SoC.AD4 SoC.AD5 SoC.AD6 SoC.AD8 SoC.AD9 SoC.AD11 SoC.AD12 SoC.AD13 SoC.AD14 SoC.AD16 SoC.AD17 SoC.AD18 SoC.AD19 SoC.AD20 SoC.AD22 SoC.AD24 SoC.AD25 SoC.AD26 SoC.AD27 SoC.AD28 SoC.AD29 SoC.AE2 SoC.AE3 SoC.AE4 SoC.AE5 SoC.AE6 SoC.AE7 SoC.AE8 SoC.AE9 SoC.AE10 SoC.AE11 SoC.AE12 SoC.AE13 SoC.AE14 SoC.AE15 SoC.AE16 SoC.AE17 SoC.AE18 SoC.AE20 SoC.AE21 SoC.AE23 SoC.AE24 SoC.AE25 SoC.AE26 SoC.AE27 SoC.AE28 SoC.AE29 SoC.AE30 SoC.AF1 SoC.AF2 SoC.AF3 SoC.AF4 SoC.AF6 SoC.AF7 SoC.AF9 SoC.AF10 SoC.AF11 SoC.AF12 SoC.AF13 SoC.AF14 SoC.AF17 SoC.AF18 SoC.AF19 SoC.AF21 SoC.AF22 SoC.AF23 SoC.AF25 SoC.AF26 SoC.AF27 SoC.AF28 SoC.AF29 SoC.AF30 SoC.AG2 SoC.AG3 SoC.AG4 SoC.AG5 SoC.AG6 SoC.AG7 SoC.AG8 SoC.AG9 SoC.AG10 SoC.AG11 SoC.AG12 SoC.AG13 SoC.AG14 SoC.AG15 SoC.AG17 SoC.AG18 SoC.AG21 SoC.AG22 SoC.AG25 SoC.AG27 SoC.AG28 SoC.AG29 SoC.AH1 SoC.AH2 SoC.AH3 SoC.AH4 SoC.AH6 SoC.AH7 SoC.AH8 SoC.AH9 SoC.AH10 SoC.AH11 SoC.AH12 SoC.AH13 SoC.AH15 SoC.AH16 SoC.AH17 SoC.AH18 SoC.AH19 SoC.AH20 SoC.AH22 SoC.AH23 SoC.AH24 SoC.AH25 SoC.AH26 SoC.AH27 SoC.AH28 SoC.AH29 SoC.AH30 SoC.AJ1 SoC.AJ2 SoC.AJ3 SoC.AJ4 SoC.AJ6 SoC.AJ7 SoC.AJ9 SoC.AJ11 SoC.AJ13 SoC.AJ15 SoC.AJ16 SoC.AJ18 SoC.AJ19 SoC.AJ21 SoC.AJ22 SoC.AJ24 SoC.AJ25 SoC.AJ27 SoC.AJ28 SoC.AJ29 SoC.AJ30 SoC.B1 SoC.B2 SoC.B3 SoC.B4 SoC.B5 SoC.B7 SoC.B8 SoC.B9 SoC.B11 SoC.B12 SoC.B13 SoC.B15 SoC.B16 SoC.B18 SoC.B19 SoC.B20 SoC.B21 SoC.B22 SoC.B23 SoC.B24 SoC.B25 SoC.B26 SoC.B27 SoC.B28 SoC.B29 SoC.B30 SoC.C2 SoC.C3 SoC.C4 SoC.C5 SoC.C6 SoC.C7 SoC.C8 SoC.C9 SoC.C10 SoC.C11 SoC.C13 SoC.C14 SoC.C15 SoC.C16 SoC.C17 SoC.C18 SoC.C19 SoC.C20 SoC.C21 SoC.C22 SoC.C23 SoC.C24 SoC.C26 SoC.C27 SoC.C28 SoC.C29 SoC.C30 SoC.D1 SoC.D2 SoC.D3 SoC.D4 SoC.D5 SoC.D7 SoC.D8 SoC.D10 SoC.D11 SoC.D12 SoC.D13 SoC.D14 SoC.D15 SoC.D16 SoC.D17 SoC.D18 SoC.D19 SoC.D20 SoC.D21 SoC.D22 SoC.D23 SoC.D24 SoC.D28 SoC.D29 SoC.E1 SoC.E2 SoC.E4 SoC.E5 SoC.E6 SoC.E7 SoC.E8 SoC.E9 SoC.E11 SoC.E12 SoC.E13 SoC.E14 SoC.E15 SoC.E16 SoC.E17 SoC.E18 SoC.E19 SoC.E20 SoC.E24 SoC.E27 SoC.E28 SoC.E29 SoC.E30 SoC.F1 SoC.F2 SoC.F3 SoC.F4 SoC.F5 SoC.F6 SoC.F9 SoC.F10 SoC.F11 SoC.F12 SoC.F13 SoC.F14 SoC.F15 SoC.F16 SoC.F17 SoC.F18 SoC.F19 SoC.F20 SoC.F22 SoC.F24 SoC.F25 SoC.F28 SoC.F29 SoC.F30 SoC.G2 SoC.G3 SoC.G4 SoC.G5 SoC.G6 SoC.G7 SoC.G9 SoC.G12 SoC.G13 SoC.G14 SoC.G15 SoC.G16 SoC.G17 SoC.G18 SoC.G19 SoC.G20 SoC.G21 SoC.G24 SoC.G25 SoC.G26 SoC.G28 SoC.G29 SoC.H1 SoC.H2 SoC.H3 SoC.H4 SoC.H5 SoC.H6 SoC.H9 SoC.H10 SoC.H12 SoC.H14 SoC.H15 SoC.H16 SoC.H17 SoC.H18 SoC.H19 SoC.H20 SoC.H21 SoC.H24 SoC.H25 SoC.H26 SoC.H28 SoC.H29 SoC.H30 SoC.J1 SoC.J2 SoC.J3 SoC.J4 SoC.J5 SoC.J6 SoC.J8 SoC.J9 SoC.J12 SoC.J13 SoC.J14 SoC.J15 SoC.J16 SoC.J17 SoC.J18 SoC.J19 SoC.J20 SoC.J21 SoC.J22 SoC.J23 SoC.J24 SoC.J25 SoC.J27 SoC.J28 SoC.J29 SoC.J30 SoC.K5 SoC.K6 SoC.K8 SoC.K9 SoC.K10 SoC.K11 SoC.K12 SoC.K13 SoC.K14 SoC.K15 SoC.K16 SoC.K17 SoC.K18 SoC.K19 SoC.K20 SoC.K21 SoC.K22 SoC.K23 SoC.K24 SoC.K25 SoC.K26 SoC.L1 SoC.L2 SoC.L3 SoC.L9 SoC.L10 SoC.L11 SoC.L12 SoC.L13 SoC.L15 SoC.L16 SoC.L17 SoC.L18 SoC.L19 SoC.L20 SoC.L21 SoC.L22 SoC.L23 SoC.L27 SoC.L28 SoC.L29 SoC.L30 SoC.M3 SoC.M4 SoC.M5 SoC.M6 SoC.M7 SoC.M9 SoC.M11 SoC.M21 SoC.M23 SoC.M26 SoC.M27 SoC.M28 SoC.M29 SoC.N1 SoC.N2 SoC.N13 SoC.N15 SoC.N17 SoC.N19 SoC.N26 SoC.N29 SoC.N30 SoC.P1 SoC.P2 SoC.P3 SoC.P4 SoC.P5 SoC.P6 SoC.P7 SoC.P9 SoC.P11 SoC.P13 SoC.P15 SoC.P17 SoC.P18 SoC.P19 SoC.P21 SoC.P22 SoC.P26 SoC.P27 SoC.P28 SoC.P29 SoC.P30 SoC.R2 SoC.R3 SoC.R4 SoC.R6 SoC.R7 SoC.R10 SoC.R11 SoC.R12 SoC.R13 SoC.R14 SoC.R15 SoC.R16 SoC.R17 SoC.R18 SoC.R19 SoC.R20 SoC.R21 SoC.R23 SoC.R25 SoC.R26 SoC.R27 SoC.R28 SoC.T1 SoC.T2 SoC.T3 SoC.T4 SoC.T5 SoC.T9 SoC.T10 SoC.T12 SoC.T14 SoC.T16 SoC.T18 SoC.T22 SoC.T25 SoC.T26 SoC.T28 SoC.T29 SoC.T30 SoC.U1 SoC.U2 SoC.U3 SoC.U5 SoC.U6 SoC.U9 SoC.U11 SoC.U13 SoC.U14 SoC.U16 SoC.U17 SoC.U19 SoC.U21 SoC.U22 SoC.U23 SoC.U24 SoC.U28 SoC.U29 SoC.V2 SoC.V8 SoC.V10 SoC.V11 SoC.V12 SoC.V13 SoC.V14 SoC.V15 SoC.V16 SoC.V18 SoC.V19 SoC.V20 SoC.V22 SoC.V24 SoC.V25 SoC.V27 SoC.V28 SoC.V29 SoC.V30 SoC.W1 SoC.W2 SoC.W3 SoC.W4 SoC.W5 SoC.W6 SoC.W9 SoC.W11 SoC.W12 SoC.W13 SoC.W15 SoC.W16 SoC.W17 SoC.W18 SoC.W22 SoC.W24 SoC.W25 SoC.W26 SoC.W28 SoC.W30 SoC.Y1 SoC.Y2 SoC.Y3 SoC.Y4 SoC.Y5 SoC.Y6 SoC.Y8 SoC.Y9 SoC.Y10 SoC.Y12 SoC.Y13 SoC.Y14 SoC.Y15 SoC.Y16 SoC.Y18 SoC.Y20 SoC.Y21 SoC.Y22 SoC.Y23 SoC.Y24 SoC.Y26 SoC.Y27 SoC.Y28 SoC.Y29 SoC.Y30